# Altium PCB PCB1.PcbDoc
Units mil, origin at the board's own origin, x right, y up, seen from the top; angles counter-clockwise.
Board outline 6950 x 9300 mil, 2 copper layers (Top Layer, Bottom Layer); 17 components, 47 nets, 191 pads, 110 vias.
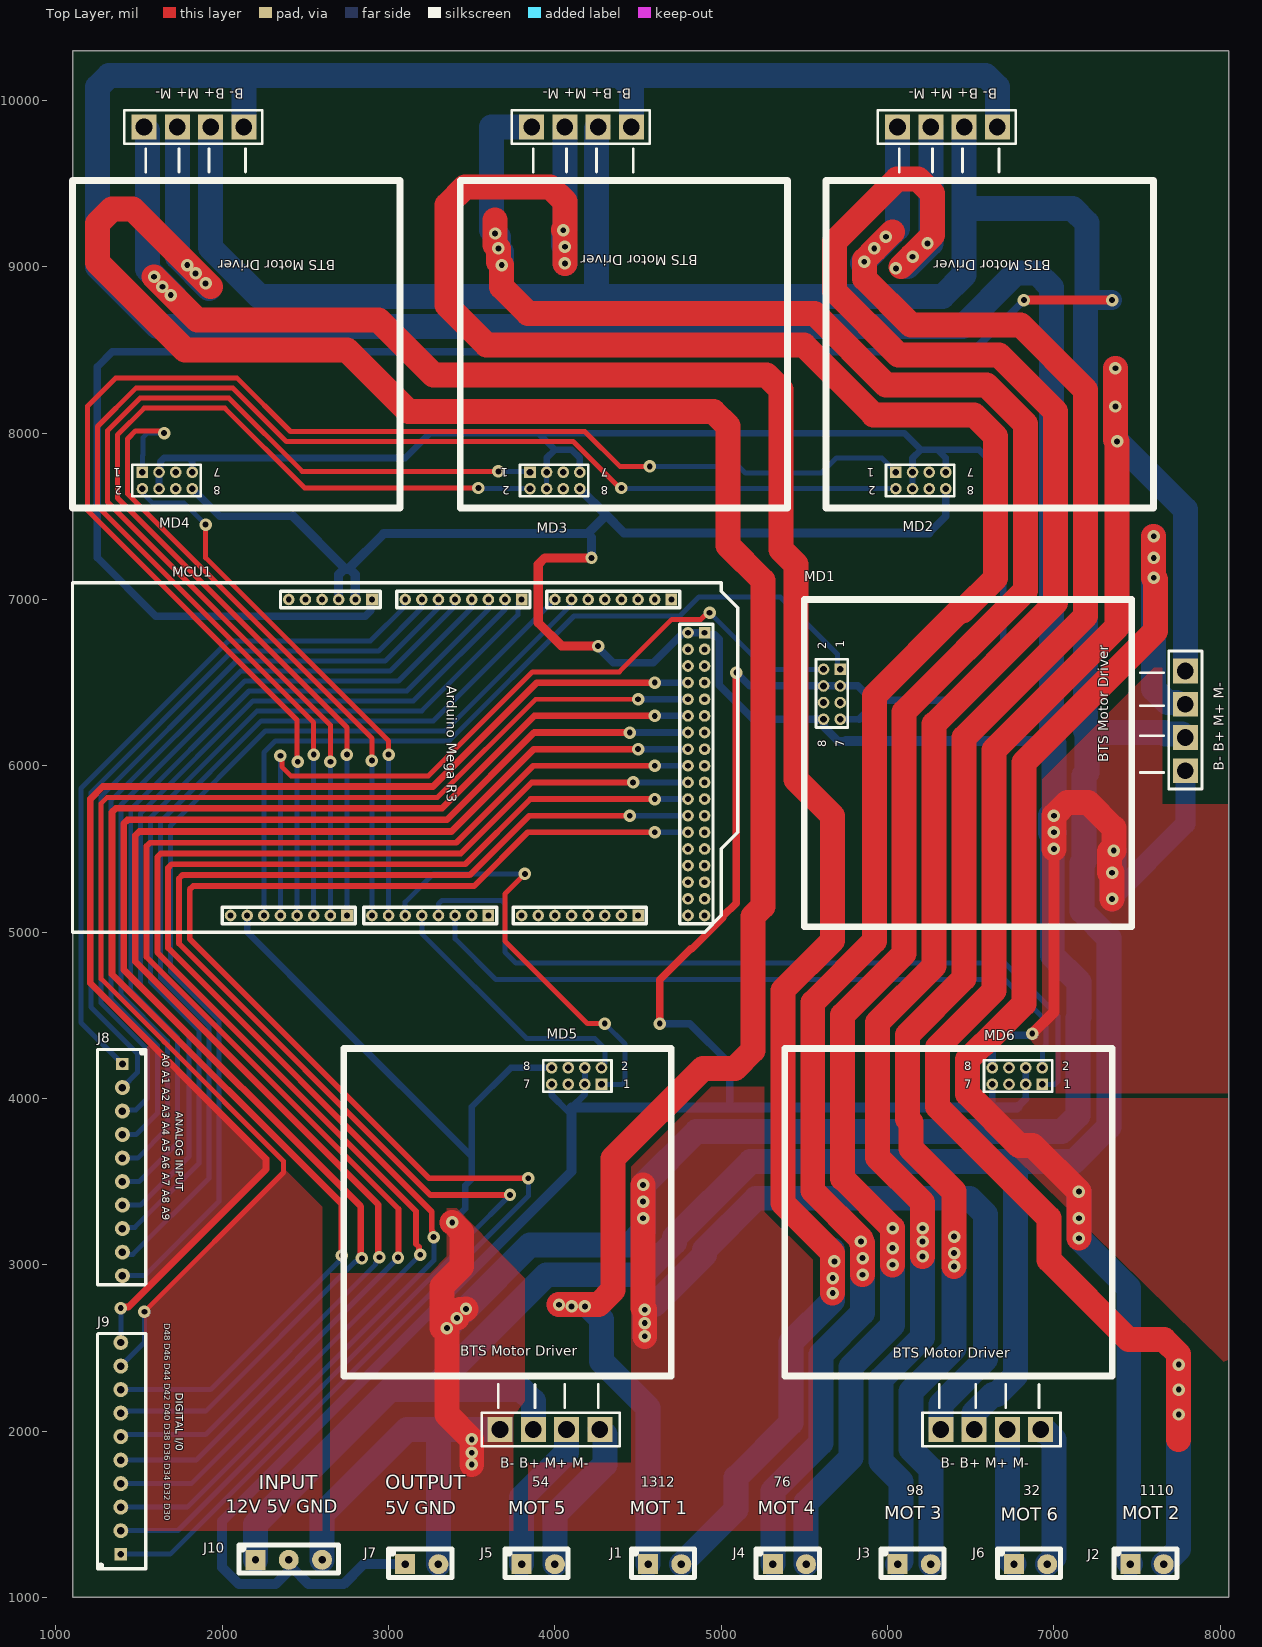
[diagram p0: Top Layer view]
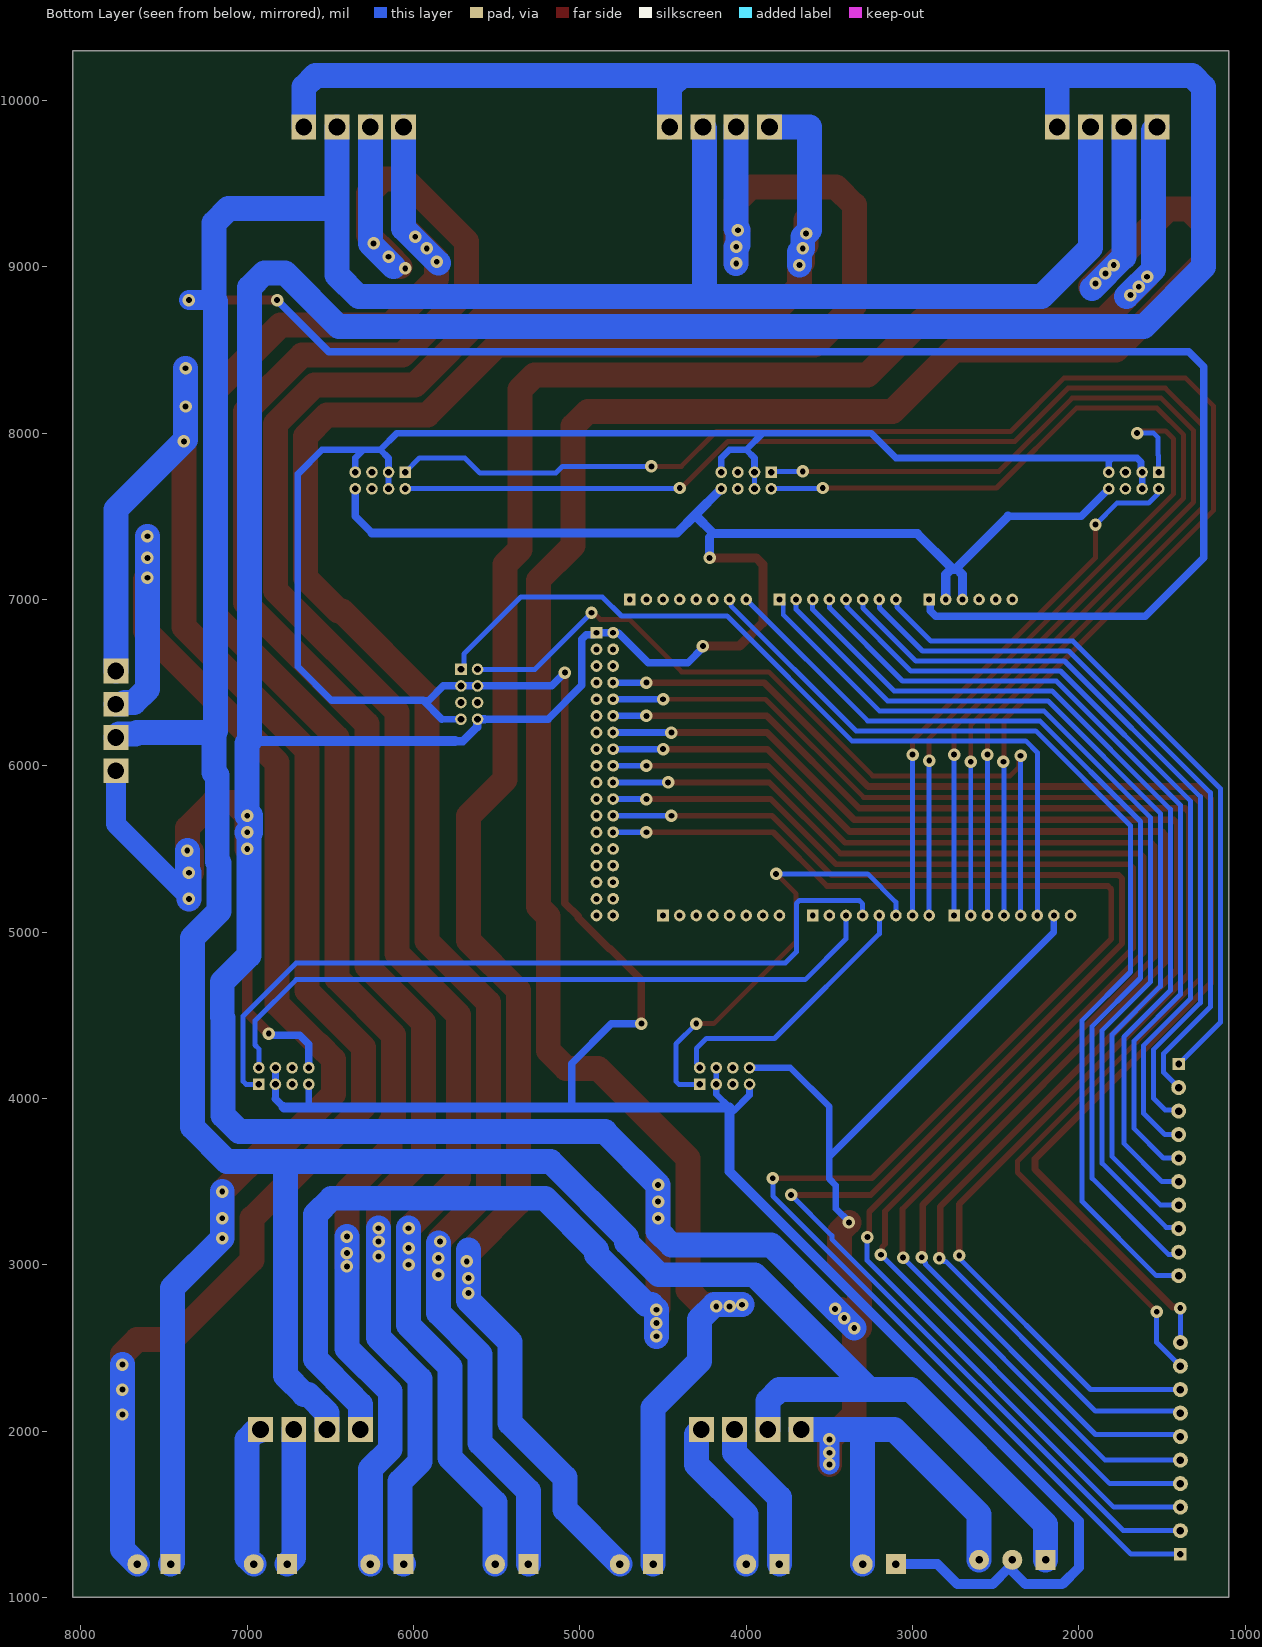
[diagram p1: Bottom Layer view, seen from below]
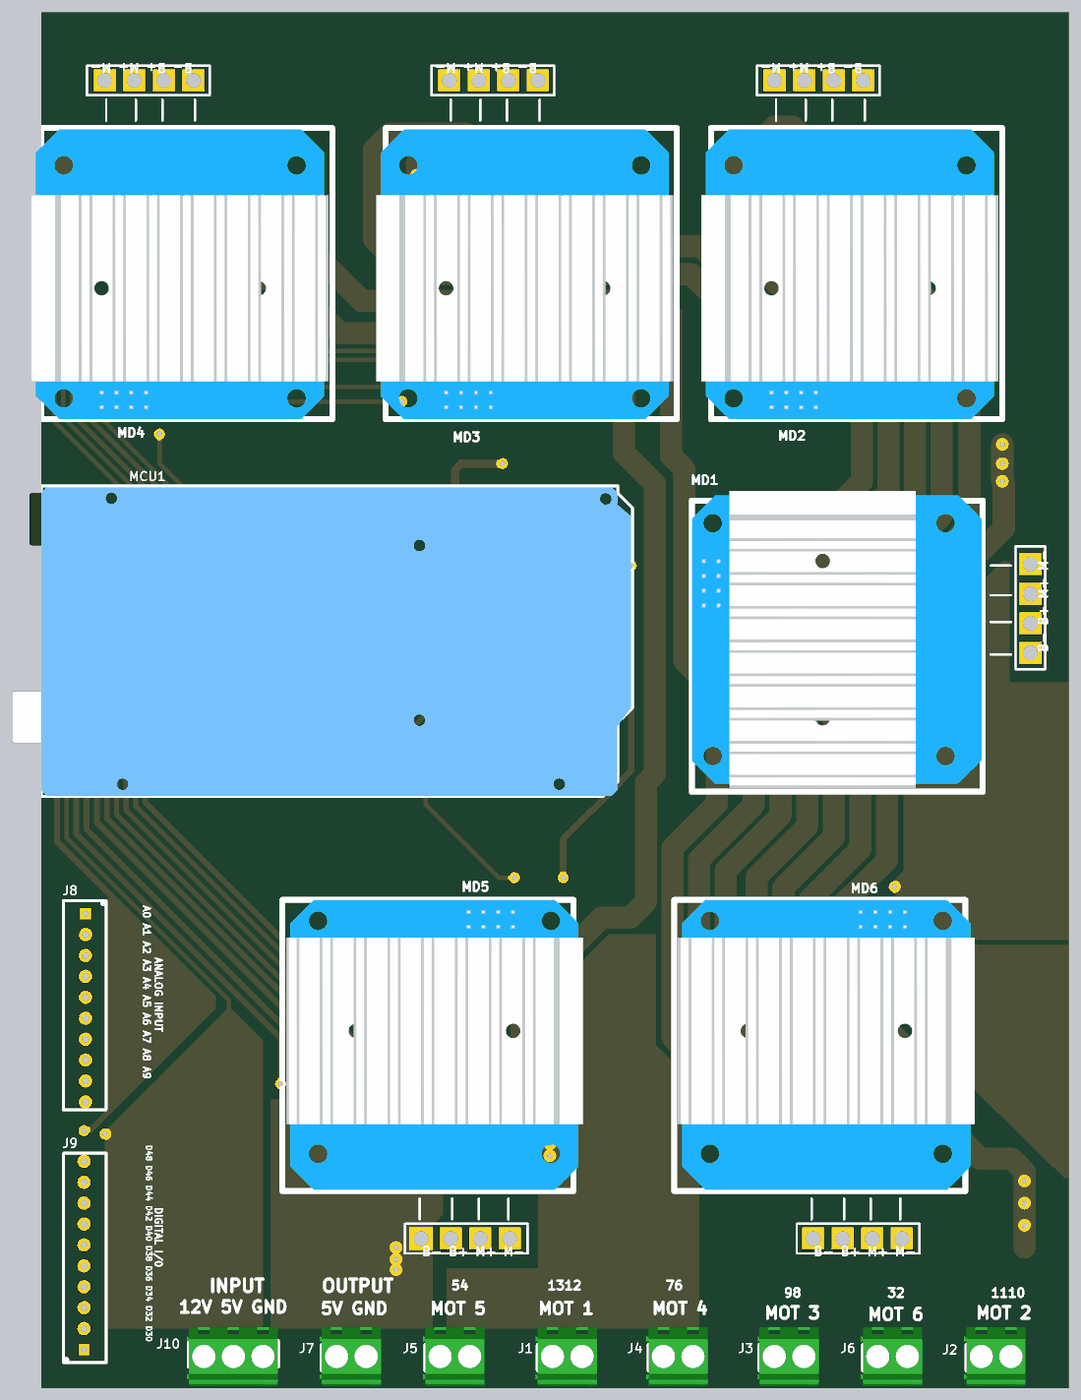
[diagram p2: 3D render of the assembled board from above, using the file's embedded part models]

## Layer stack, top to bottom
Top Solder: solder mask 0.4, Solder Resist, Dk 3.5
Top Layer: signal copper 1.4
Dielectric 1: dielectric 12.6, FR-4, Dk 4.8
Bottom Layer: signal copper 1.4
Bottom Solder: solder mask 0.4, Solder Resist, Dk 3.5

## Board outline
1100,1000 1100,10300 8050,10300 8050,1000

## Design rules (kind name [scope] priority, off if disabled: settings)
Clearance [All] p1: gap=30 ignorepadtopadclearanceinfootprint=FALSE
Height [All] p1: minheight=0 maxheight=2000 prefheight=500
HoleSize [All] p1: absolutevalues=TRUE maxlimit=100 minlimit=30 maxpercent=80.000 minpercent=20.000
PlaneConnect [All] p1: planeconnectstyle=Direct reliefexpansion=20 reliefentries=4 reliefconductorwidth=10 reliefairgap=10
PolygonConnect [All] p1: connectstyle=Direct reliefconductorwidth=10 reliefentries=4 polygonreliefangle="90 Angle" airgapwidth=10
RoutingVias [All] p1: holewidth=35 width=70 viastyle="Through Hole" minholewidth=35 minwidth=70 maxholewidth=35 maxwidth=75
SolderMaskExpansion [All] p1: expansion=5 istentingtop=FALSE
Width [All] p1: maxlimit=150 minlimit=30 preferedwidth=30 minimp=50.000000 maximp=50.000000 favimp=50.000000
27 further rules are at their usual default settings.

## Components (designator, comment, footprint, x,y, rotation, side; value= is the part's Value field where it differs from the comment)
J1 "T_Block_2P" T_BLOCK_2P 4700,1200 r0 top locked
J2 "T_Block_2P" T_BLOCK_2P 7600,1200 r0 top locked
J3 "T_Block_2P" T_BLOCK_2P 6200,1200 r0 top locked
J4 "T_Block_2P" T_BLOCK_2P 5450,1200 r0 top locked
J5 "T_Block_2P" T_BLOCK_2P 3940,1200 r0 top locked
J6 "T_Block_2P" T_BLOCK_2P 6900,1200 r0 top locked
J7 "T_Block_2P" T_BLOCK_2P 3240,1200 r0 top locked
J8 "TBlock10p_3.6mm" T_BLOCK_3.6MM 1410,3567.1 r270 top locked
J9 "TBlock10p_3.6mm" T_BLOCK_3.6MM 1380,1900.06 r90 top locked
J10 "T_Block_3P" T_BLOCK_3P 2400,1226.3 r0 top locked
MCU1 "Arduino_Mega_R3" PCB_FOOTPRINT_MEGA 3160,6070 r270 top locked
MD1 "Motor Driver" PCB_BTS 6400,5900 r90 top locked
MD2 "Motor Driver" PCB_BTS 6730,8450 r180 top locked
MD3 "Motor Driver" PCB_BTS 4530,8450 r180 top locked
MD4 "Motor Driver" PCB_BTS 2200,8450 r180 top locked
MD5 "Motor Driver" PCB_BTS 3600,3400 r0 top locked
MD6 "Motor Driver" PCB_BTS 6250,3400 r0 top locked

## Footprints (in the part's own frame and the unit in brackets; to place one, negate y for a bottom-side part, rotate by r counter-clockwise, add the part's x,y. Pads: shape width x height; smd on the part's side, far side on the other; paste and mask are expansions set on the pad)
PCB_BTS [mil]
  rect 70x70 hole 40: 1(680,685)
  round 70 hole 40: 2(680,785) 3(580,685) 4(580,785) 5(480,685) 6(480,785) 7(380,685) 8(380,785)
  rect 150x150 hole 100: 9(270,-1390) 10(70,-1390) 11(470,-1390) 12(670,-1390)
  silkscreen extent -869,-1490 1100,900, body extent -844,-1060 1164,900, height 1306
PCB_FOOTPRINT_MEGA [mil] "Arduino_Mega"
  rect 70x70 hole 35.43: 0(970,440) 8(970,-410) 21(970,1340) 59(-930,-260) 67(-930,640) 75(-930,1540) 79(-730,1740)
  round 70 hole 35.43: 1(970,340) 2(970,240) 3(970,140) 4(970,40) 5(970,-60) 6(970,-160) 7(970,-260) 9(970,-510) 10(970,-610) 11(970,-710) 12(970,-810) 13(970,-910) 14(970,640) 15(970,740) 16(970,840) 17(970,940) 18(970,1040) 19(970,1140) 20(970,1240) 22(870,1640) 23(870,1740) 24(770,1640) 25(770,1740) 26(670,1640) 27(670,1740) 28(570,1640) 29(570,1740) 30(470,1640) 31(470,1740) 32(370,1640) 33(370,1740) 34(270,1640) 35(270,1740) 36(170,1640) 37(170,1740) 38(70,1640) 39(70,1740) 40(-30,1640) 41(-30,1740) 42(-130,1640) 43(-130,1740) 44(-230,1640) 45(-230,1740) 46(-330,1640) 47(-330,1740) 48(-430,1640) 49(-430,1740) 50(-530,1640) 51(-530,1740) 52(-630,1640) 53(-630,1740) 54(-930,-760) 55(-930,-660) 56(-930,-560) 57(-930,-460) 58(-930,-360) 60(-930,-60) 61(-930,40) 62(-930,140) 63(-930,240) 64(-930,340) 65(-930,440) 66(-930,540) 68(-930,840) 69(-930,940) 70(-930,1040) 71(-930,1140) 72(-930,1240) 73(-930,1340) 74(-930,1440) 76(970,-1010) 77(970,-1110) 78(-730,1640) 80(970,1740) 81(970,1640)
  silkscreen extent -1030,-2060 1070,1940, body extent -1020,-2257 1067,1927, height 490
T_BLOCK_2P [mil]
  rect 120x120 hole 45: 1(-140,0)
  round 120 hole 45: 2(60,0)
  silkscreen extent -240,-80 140,90, body extent -258,-184 158,210, height 571
T_BLOCK_3.6MM [mil]
  rect 75x75 hole 40: 1(-640,-10)
  round 90 hole 45: 2(-498.58,-10) 3(-357.16,-10) 4(-215.74,-10) 5(-74.32,-10) 6(67.1,-10) 7(208.52,-10) 8(349.94,-10) 9(491.36,-10) 10(632.78,-10)
  silkscreen extent -727,-160 687,130
T_BLOCK_3P [mil]
  rect 120x120 hole 45: 1(-200,0)
  round 120 hole 45: 2(0,0) 3(200,0)
  silkscreen extent -300,-80 300,90, body extent -316,-210 300,184, height 571

## Part data
J1 J2 J3 J4 J5 J6 J7 J8 J9 J10: "Terminal"
MCU1: library part Mega, "Arduino Mega"
MD1 MD2 MD3 MD4 MD5 MD6: library part BTS

## Via types
v1: diameter 75, hole 35, Top Layer to Bottom Layer, 110 vias

## Nets (pads, with @x,y where several pads share a name; then routed paths per layer and width w, separated by ;. In a path a pad name is that pad's centre, name@x,y a point inside that pad or via, vN(x,y) a via of type N, cw(c..) or ccw(c..) an arc to the next point about the centre after c; other vN are vias at no path point)
5V: J7.1 J10.2 MD1.3 MD1.4 MD1.7 MD2.3 MD2.4 MD2.7 MD3.3 MD3.4 MD3.7 MD4.3 MD4.4 MD4.7 MD5.3 MD5.4 MD5.7 MD6.3 MD6.4 MD6.7 | length 21342
  Top Layer w45: v1(4630,4450) 4630,4714 4816.26,4900.25 4824,4900.25 5010.25,5086.51 5010.25,5094.25 5090,5174 v1(5090,6560)
  Bottom Layer w30: MD4.3 MD4.3@1626.51,7771.51 ; MD3.4 MD3.3 ; 4077.22,3922.78 4100,3945.55
  Bottom Layer w35: MD5.3 MD5.4 ; MD2.4 MD2.3
  Bottom Layer w40: MD4.4 MD4.3 ; MD4.3@1626.51,7771.51 1626.51,7826.51 1650,7850 1800,7850 ; MD4.7 1820,7830 1800,7850 ; MD3.3 3950,7850 4000,7900 ; MD5.7 3980,4020 4077.22,3922.78 ; 4100,3945.55 4180,4025.55 MD5.3 ; MD3.7 4150,7850 4100,7900 4000,7900 ; MD1.7 5830,6280 ; 5907.46,6392.54 5942.54,6392.54 ; MD2.3 6150,7850 6200,7900 ; MD2.7 6350,7850 6300,7900 ; 6492.54,6392.54 6695,6595 6695,7755 6550,7900 6300,7900 ; 6630,3970 MD6.7 ; 6830,3997.57 MD6.3 MD6.4 ; 1800,7850 3100,7850 3250,8000 3900,8000 ; 3900,8000 6100,8000 6200,7900 ; 3900,8000 4000,7900 ; 6200,7900 6300,7900
  Bottom Layer w45: v1(4630,4450) 4810,4450 5050,4210 5050,3945.55 ; v1(5090,6560) 5170,6480 MD1.3 ; MD1.3@5726.55,6480 5820,6480 5907.46,6392.54 ; 5830,6280 5942.54,6392.54 6492.54,6392.54 ; 6782.43,3950 6830,3997.57
  Bottom Layer w60: J10.2 2400,1160 2320,1080 2100,1080 2000,1180 2000,1460 4100,3560 4100,3922.78 4100,3945.55 5050,3945.55 6630,3945.55 6777.98,3945.55 6782.43,3950 ; J10.2@2420,1180 2520,1080 2730,1080 2850,1200 J7.1
12V: J10.1 MCU1.59 MD1.9 MD2.9 MD3.9 MD4.9 MD5.9 MD6.9 | length 32575.4
  Top Layer w55: v1(6820,8800) v1(7350,8800)
  Bottom Layer w45: MCU1.59 2892.27,6992.27 2892.27,6932.27 2860,6900 1600,6900 1250,7250 1250,8400 1340,8490 6510,8490 v1(6820,8800)
  Bottom Layer w120: 7200,8800 v1(7350,8800)
  Bottom Layer w150: MD4.9 1930,9114.56 2223.66,8820.9 4230,8820.9 ; J10.1 2200,1440 3010,2250 3260,2250 ; MD5.9 3870,2180 3800,2250 3260,2250 ; MD3.9 4250,9830 4250,8840.9 4230,8820.9 ; MD2.9 6460,9350 ; MD6.9 6520,2108.49 6632.89,2221.38 6657.11,2221.38 6770,2334.26 6770,3620 ; MD1.9 7770,6190 7671.51,6190 7661.51,6200 7200,6200 ; 3260,2250 3950,2940 4524.56,2940 4719.56,3135 4719.56,3164.12 5175.44,3620 6770,3620 ; 4230,8820.9 4230.9,8820 6329.1,8820 6460,8950.9 6460,9350 ; 6460,9350 7112.13,9350 7200,9262.13 7200,8800 7190,8790 7190,6210 7200,6200 ; 6770,3620 7120.71,3620 7330,3829.29 7330,4965.44 7170,5125.44 7170,5415.44 7180,5425.44 7180,5940.44 7200,5960.44 7200,6200
A0: J8.1 MCU1.60 | length 4204.2
  Bottom Layer w30: J8.1 1150,4457.1 1150,5863.68 2036.32,6750 2890,6750 3093.43,6953.43 3093.43,6993.43 MCU1.60
A1: J8.2 MCU1.61 | length 4426.7
  Bottom Layer w30: J8.2 1490,4155.68 1490,4270 1210,4550 1210,5838.82 2061.18,6690 2940,6690 3198.43,6948.43 3198.43,6998.43 MCU1.61
A2: J8.3 MCU1.62 | length 4661.9
  Bottom Layer w30: J8.3 1407.65,3931.91 1481.91,3931.91 1550,4000 1550,4294.85 1270,4574.85 1270,5813.97 2086.03,6630 2980,6630 3298.43,6948.43 3298.43,6998.43 MCU1.62
A3: J8.4 MCU1.63 | length 4852.8
  Bottom Layer w30: J8.4 1482.84,3782.84 1610,3910 1610,4319.71 1330,4599.71 1330,5789.12 2110.88,6570 3010,6570 3393.43,6953.43 3393.43,6993.43 MCU1.63
A4: J8.5 MCU1.64 | length 5055.4
  Bottom Layer w30: J8.5 1491.42,3641.42 1670,3820 1670,4344.56 1390,4624.56 1390,5764.26 2135.74,6510 3060,6510 3498.43,6948.43 3498.43,6998.43 MCU1.64
A5: J8.6 MCU1.65 | length 5258
  Bottom Layer w30: J8.6 1500,3500 1730,3730 1730,4369.41 1450,4649.41 1450,5739.41 2160.59,6450 3110,6450 3600,6940 MCU1.65
A6: J8.7 MCU1.66 | length 5463
  Bottom Layer w30: J8.7 1508.58,3358.58 1800,3650 1800,4384.26 1510,4674.26 1510,5714.56 2185.44,6390 3150,6390 3700,6940 MCU1.66
A7: J8.8 MCU1.67 | length 5636.3
  Bottom Layer w30: J8.8 1407.65,3224.81 1474.81,3224.81 1860,3610 1860,4409.12 1570,4699.12 1570,5689.71 2210.29,6330 3200,6330 3777.23,6907.23 3777.23,6977.23 MCU1.67
A8: J8.9 MCU1.68 | length 5903.1
  Bottom Layer w30: J8.9 1407.65,3068.09 1431.91,3068.09 1437.57,3062.43 1462.43,3062.43 1920,3520 1920,4433.97 1630,4723.97 1630,5630 1630,5664.85 2235.15,6270 3270,6270 MCU1.68
A9: J8.10 MCU1.69 | length 6135.6
  Bottom Layer w30: J8.10 1534.32,2934.32 1980,3380 1980,4470 1690,4760 1690,5640 2260,6210 3340,6210 4092.35,6962.35 4092.35,6992.35 MCU1.69
D30: J9.1 MCU1.30 | length 9515.4
  Top Layer w35: v1(3840,3520) 3243.15,3520 1804.87,4958.29 1804.87,5257 1825.37,5277.5 3514.42,5277.5 3836.92,5600 v1(4600,5600)
  Bottom Layer w30: J9.1 1686.73,1260.06 3840,3413.33 v1(3840,3520)
  Bottom Layer w35: v1(4600,5600) MCU1.30
D32: J9.2 MCU1.32 | length 9412.2
  Top Layer w35: v1(3730,3420) 3251.23,3420 1739.87,4931.36 1739.87,5322 1760.37,5342.5 3487.49,5342.5 3844.99,5700 v1(4450,5700)
  Bottom Layer w30: J9.2 1390.78,1402.26 1733.78,1402.26 3485.21,3153.68 3485.21,3175.21 v1(3730,3420)
  Bottom Layer w35: v1(4450,5700) MCU1.32
D34: J9.3 MCU1.34 | length 8815.9
  Top Layer w35: v1(3270.83,3166.7) 3263.18,3174.35 3263.18,3201.3 3260,3204.48 3260,3319.31 1674.87,4904.44 1674.87,5387 1695.37,5407.5 3460.57,5407.5 3853.07,5800 v1(4600,5800)
  Bottom Layer w30: J9.3 1789.57,1542.9 3272.5,3025.83 3272.5,3165.03 v1(3270.83,3166.7)
  Bottom Layer w35: v1(4600,5800) MCU1.34
D36: J9.4 MCU1.36 | length 8792
  Top Layer w35: v1(3190,3060) 3182.35,3067.65 3182.35,3107.65 3165.12,3124.88 3165.12,3322.26 1609.87,4877.51 1609.87,5452 1630.37,5472.5 3433.64,5472.5 3861.14,5900 v1(4470,5900)
  Bottom Layer w30: J9.4 1814.32,1684.32 v1(3190,3060)
  Bottom Layer w35: v1(4470,5900) MCU1.36
D38: J9.5 MCU1.38 | length 8730.4
  Top Layer w35: v1(3056.66,3043.34) 3060,3046.67 3060,3335.46 1544.87,4850.59 1544.87,5517 1565.37,5537.5 3406.72,5537.5 3869.22,6000 v1(4600,6000)
  Bottom Layer w30: J9.5 1841.81,1825.74 3056.66,3040.6 v1(3056.66,3043.34)
  Bottom Layer w35: v1(4600,6000) MCU1.38
D40: J9.6 MCU1.40 | length 8694.8
  Top Layer w40: v1(2944.7,3045.3) 2938,3052 2938,3362 1477.37,4822.63 1477.37,5581.57 1500.8,5605 3378.76,5605 3873.76,6100 v1(4500,6100)
  Bottom Layer w30: J9.6 1401.48,1978.64 1436.21,1978.64 1437.57,1980 1900,1980 2922.4,3002.4 2922.4,3010.83 2944.7,3033.13 v1(2944.7,3045.3)
  Bottom Layer w40: v1(4500,6100) MCU1.40
D42: J9.7 MCU1.42 | length 8661.2
  Top Layer w40: v1(2839.9,3038.74) 2833.2,3045.44 2833.2,3349.64 1407.37,4775.47 1407.37,5651.57 1430.8,5675 3349.77,5675 3874.77,6200 v1(4450,6200)
  Bottom Layer w30: J9.7 1401.42,2120 1900,2120 2800.99,3020.99 2809.97,3020.99 2827.72,3038.74 v1(2839.9,3038.74)
  Bottom Layer w40: v1(4450,6200) MCU1.42
D44: J9.8 MCU1.44 | length 8613.1
  Top Layer w40: v1(2719.23,3055.9) 2719.23,3364.62 1337.37,4746.48 1337.37,5721.57 1360.8,5745 3320.77,5745 3875.77,6300 v1(4600,6300)
  Bottom Layer w30: J9.8 1930,2250 2710.61,3030.61 2710.61,3047.29 v1(2719.23,3055.9)
  Bottom Layer w40: v1(4600,6300) MCU1.44
D46: J9.9 MCU1.46 | length 8028.8
  Top Layer w30: v1(1531.87,2718.13) 2368.54,3554.79 2368.54,3623.39 1651.18,4340.74 1272.37,4719.55 1272.37,5773.79 1308.58,5810 3293.85,5810 3883.85,6400 v1(4500,6400)
  Bottom Layer w30: J9.9 1531.87,2533.29 v1(1531.87,2718.13)
  Bottom Layer w40: v1(4500,6400) MCU1.46
D48: J9.10 MCU1.48 | length 7972.8
  Top Layer w40: v1(1390,2740) 1396.7,2746.7 1436.7,2746.7 2263.43,3573.43 2263.43,3636.57 1207.37,4692.63 1207.37,5800.72 1281.65,5875 3266.92,5875 3891.92,6500 v1(4600,6500)
  Bottom Layer w30: J9.10 v1(1390,2740)
  Bottom Layer w40: v1(4600,6500) MCU1.48
GND: J7.2 J10.3 MCU1.57 MCU1.58 MCU1.76 MCU1.78 MCU1.79 MD1.8 MD1.10 MD2.8 MD2.10 MD3.8 MD3.10 MD4.8 MD4.10 MD5.8 MD5.10 MD6.8 MD6.10 | length 49770.3
  Top Layer w55: v1(4220,7250) 3940,7250 3900,7210 3900,6860 4040,6720 v1(4260,6720)
  Top Layer w65: v1(6870,4390) 7000,4520 v1(7000,5500)
  Top Layer w150: v1@3320,2619.54 3320,2711.36 ; v1(3350.46,2619.54) 3350.46,2099.54 v1(3500,1950) v1(3500,1870) v1(3500,1800) ; v1(3382.5,3255.22) 3440,3197.72 3440,2990 3320,2870 3320,2711.36 ; v1(3410.46,2679.54) v1@3410.46,2711.36 ; v1(3465.46,2734.54) 3461.83,2730.91 3430.01,2730.91 v1@3410.46,2711.36 ; v1(4530,3480) v1(4530,3380) v1(4530,3280) 4530,2740 v1(4540,2730) v1(4540,2650) v1(4540,2570) ; v1(7000,5500) v1(7000,5600) v1(7000,5700) 7080.37,5780.37 7204.63,5780.37 7360,5625 v1(7360,5490) ; v1@7334.65,5357.3 v1@7334.65,5485.35 ; v1(7350,5200) v1(7350,5357.3) ; 3320,2711.36 v1@3410.46,2711.36
  Bottom Layer w30: 4195.78,7395.78 4220,7371.55
  Bottom Layer w35: 2731.76,7181.76 2737.57,7187.57
  Bottom Layer w40: MCU1.76 2150,5000 2654.02,4495.98 3500,3650 ; v1(3382.5,3255.22) 3382.5,3259.78 3461.36,3338.64 3461.36,3477.71 3500,3516.35 3500,3650 ; MD5.8 3735,4185 3500,3950 3500,3650 ; MD1.8@5606.88,6280 MD1.8 ; 5748,6148 5750,6150
  Bottom Layer w45: MD4.8 1985,7500 2425.15,7500 ; v1@4260,6710 4350,6620 4590,6620 4767.31,6797.31 4797.31,6797.31 MCU1.78 MCU1.79 4912.5,6787.5 4961.14,6787.5 4987.5,6761.14 4987.5,6483.93 5191.43,6280 5572.51,6280 ; 6250,7400 6350,7500 MD2.8 ; MD6.8 6630,4325.94 6684.06,4380 6838.79,4380 6843.05,4384.26 6864.26,4384.26 v1(6870,4390)
  Bottom Layer w50: 5572.51,6280 MD1.8 ; MD1.8@5617.55,6277.45 5617.55,6232.45 5702,6148 5748,6148
  Bottom Layer w55: 2425.15,7500 2737.57,7187.57 ; MCU1.57 2700,7150 2731.76,7181.76 2762.43,7181.76 ; MCU1.58 2800,7150 2762.43,7187.57 2970.63,7395.78 4195.78,7395.78 4307.5,7507.5 ; MD3.8 4307.5,7507.5 ; v1(4220,7250) 4220,7371.55 ; 6250,7400 4415,7400 4307.5,7507.5
  Bottom Layer w60: 5750,6150 6985,6150
  Bottom Layer w120: v1(3500,1800) v1(3500,1870) v1(3500,1950) 3500,2010 ; v1@7350,5210 7790,5650 MD1.10
  Bottom Layer w150: MD4.10 2130,10150 ; J10.3 2600,1500 3110,2010 3300,2010 ; J7.2 3300,2010 ; v1(3350.46,2619.54) v1(3410.46,2679.54) v1(3465.46,2734.54) 3850.92,3120 4450,3120 4530,3200 v1(4530,3280) v1(4530,3380) v1(4530,3480) 4850,3800 7046.15,3800 7144.57,3898.42 7144.57,4484.57 7150,4490 7150,4700 6990,4860 6990,5590 v1(7000,5600) ; MD5.10 3500,2010 3300,2010 ; MD3.10 4460,10079.71 4389.71,10150 ; v1(4540,2570) v1(4540,2650) v1(4540,2730) 4570,2760 4599.12,2760 4899.56,3060.44 4899.56,3089.56 5210,3400 6492.13,3400 6590,3302.13 6590,2433.05 6360,2203.05 6360,2200.88 6320,2160.88 MD6.10 ; MD2.10 6660,10079.71 6589.71,10150 4389.71,10150 ; v1@6980,5600 v1@6980,5700 ; v1(7000,5700) 7000,6135 6985,6150 6985,8875.92 6897.13,8963.79 6772.87,8963.79 6449.08,8640 1610,8640 1250,9000 1250,10079.71 1320.29,10150 2130,10150 ; v1(7350,5200) 7350,5210 v1(7350,5357.3) ; v1@7360,5357.3 v1(7360,5490) ; 2130,10150 4389.71,10150
NetJ1_1: J1.1 MD4.11 | length 14399.1
  Top Layer w150: v1@1930,8880 1462.13,9347.87 1337.87,9347.87 1250,9260 1250,9025.44 1775.44,8500 2750,8500 3120,8130 4952.13,8130 5040,8042.13 5040,7325 5250,7115 5250,5153.68 5190,5093.68 5190,4287.87 5082.13,4180 4890,4180 4350,3640 4350,2847.87 4262.13,2760 v1(4024.56,2760)
  Bottom Layer w150: MD4.11 1730,9060 v1@1920,8870 ; v1(4024.56,2760) 4192.13,2760 4280,2672.13 4280,2420 4560,2140 J1.1
  other v1: 4100,2750 4180,2750 1900,8900 1840,8960 1790,9010
NetJ1_2: J1.2 MD4.12 | length 13222.3
  Top Layer w150: v1(1590,8940) 1850,8680 2940,8680 3270,8350 5272.13,8350 5360,8262.13 5360,7300 5450,7210 5450,5917.37 5670,5697.37 5670,4950.34 5370,4650.34 5370,3370.88 5670,3070.88 v1(5670,2830)
  Bottom Layer w150: MD4.12 1550,9820 1550,8985.44 v1@1714.54,8820.9 ; J1.2 5090,1530 5090,1720 5420,2050 5420,2535.84 5670,2785.84 v1(5670,2830) 5670,3090
  other v1: 5670,2920 5680,3020 1690,8830 1640,8880
NetJ2_1: J2.1 MD1.11 | length 8535.1
  Top Layer w150: v1(7150,3160) v1(7150,3440) 6872.57,3717.43 6790.43,3717.43 6480,4027.87 6480,4232.99 6572.01,4325 6576.25,4325 6820,4568.75 6820,6020 7610,6810 7610,7120 v1(7600,7130) v1(7600,7380)
  Bottom Layer w150: v1(7150,3440) v1(7150,3160) 7450,2860 7450,1210 J2.1 ; v1(7600,7380) 7600,6461.51 7681.51,6380 7736.07,6380 7746.07,6370 MD1.11
  other v1: 7150,3280 7600,7250
NetJ2_2: J2.2 MD1.12 | length 10833.5
  Top Layer w150: v1@7370,7960 v1(7370,8160) v1(7370,8390) ; v1(7380,7950) 7380,6834.56 6640,6094.56 6640,4647.55 6300,4307.55 6300,3950 6970,3280 6970,3030 7450,2550 7662.13,2550 7750,2462.13 v1(7750,2400) v1(7750,2250) v1(7750,2100) 7750,1950
  Bottom Layer w150: v1(7370,8390) 7370,7960 7790,7540 MD1.12 ; J2.2 7750,1290 v1(7750,2100) v1(7750,2250) v1(7750,2400)
NetJ3_1: J3.1 MD2.11 | length 11939
  Top Layer w150: v1@6080,9000 6145,9065 6270,9190 6270,9440 6182.13,9527.87 6057.87,9527.87 5682.13,9152.13 5682.13,8853.31 6065.44,8470 6669.12,8470 7010,8129.12 7010,6980 6280,6250 6280,4796.66 5940,4456.66 5940,3645.44 6210,3375.44 v1(6210,3220) v1(6210,3140) v1(6210,3050)
  Bottom Layer w150: J3.1 6080,1220 6080,1696.95 5960,1816.95 5960,2312.17 6210,2562.17 v1(6210,3220) ; 6120,9000 6260,9140 MD2.11
  other v1: 6050,8990 6150,9060 6240,9140
NetJ3_2: J3.2 MD2.12 | length 10818.4
  Top Layer w150: 6030,9210 5925,9105 5862.13,9042.13 5862.13,8927.87 6140,8650 6800,8650 7190,8260 7190,6899.12 6460,6169.12 6460,4722.11 6120,4382.11 6120,3875.44 6140,3855.44 6140,3700 6400,3440 v1(6400,3170) v1(6400,3070) v1(6400,2990)
  Bottom Layer w150: v1@5850,9021.34 6060,9231.34 MD2.12 ; J3.2 6260,1771.51 6140,1891.51 6140,2237.61 6400,2497.61 v1(6400,3170)
  other v1: 5860,9030 5920,9110 5990,9180
NetJ4_1: J4.1 MD3.11 | length 14013.7
  Top Layer w150: v1(4060,9020) 4060,9210 v1(4050,9220) 4060,9230 4060,9392.13 3972.13,9480 3460,9480 3350,9370 3350,8770 3590,8530 5496.32,8530 5916.32,8110 6520,8110 6650,7980 6650,7129.12 6450.88,6930 6430,6930 5920,6420 5920,4945.78 5550,4575.78 5550,3445.44 5840,3155.44 v1(5840,3140) 5850,3130 v1(5850,3040) v1(5850,2940)
  Bottom Layer w150: v1(4060,9020) v1(4060,9120) 4050,9130 v1(4050,9220) 4060,9230 MD3.11 ; J4.1 5310,1640 5600,1930 5600,2461.28 5850,2711.28 v1(5850,2940) v1(5850,3040) v1@5850,3130
NetJ4_2: J4.2 MD3.12 | length 12874.4
  Top Layer w150: 3640,9280 3640,9130 v1(3660,9110) 3660,9030 v1(3680,9010) 3680,8877.87 3837.87,8720 5560.88,8720 5990.88,8290 6594.56,8290 6830,8054.56 6830,7054.56 6100,6324.56 6100,4871.22 5730,4501.22 5730,3520 v1(6030,3220) v1(6030,3100) v1(6030,3000)
  Bottom Layer w150: v1(3680,9010) 3680,9090 v1(3660,9110) 3660,9180 3620,9220 3620,9840 MD3.12 ; J4.2 5510,1570 5780,1840 5780,2386.73 6030,2636.73 v1(6030,3220)
  other v1: 3640,9200
NetJ5_1: J5.1 MD5.11 | length 921.8
  Bottom Layer w150: J5.1 3800,1600 4070,1870 MD5.11
NetJ5_2: J5.2 MD5.12 | length 946.7
  Bottom Layer w150: J5.2 4000,1500 4300,1800 4300,1980 MD5.12
NetJ6_1: J6.1 MD6.11 | length 826.6
  Bottom Layer w150: MD6.11 6720,1240 J6.1
NetJ6_2: J6.2 MD6.12 | length 871.4
  Bottom Layer w150: MD6.12 6930,2000 6950,2000 7000,1950 7000,1240 J6.2
NetMCU1_2: MCU1.2 MD6.2 | length 4188.3
  Bottom Layer w30: MCU1.2 3400,4960 3645.4,4714.6 6705.4,4714.6 6952.5,4467.5 6952.5,4321.25 6930,4298.75 MD6.2
NetMCU1_3: MCU1.3 MD6.1 | length 4756.1
  Bottom Layer w30: MCU1.3 3300,5170 3320,5190 3642.43,5190 3681,5190 3698.58,5172.43 3698.58,4880.88 3764.73,4814.73 6705.27,4814.73 7024.57,4495.43 7024.57,4102.57 7007,4085 MD6.1
NetMCU1_4: MCU1.4 MD5.2 | length 1619.1
  Bottom Layer w30: MCU1.4 3200,4990 3830,4360 4240,4360 4300,4300 4300,4214.2 4280,4194.2 MD5.2
NetMCU1_5: MCU1.5 MD5.1 | length 2677.7
  Top Layer w30: v1(3820,5350) 3700,5230 3700,4945.94 4195.94,4450 v1(4300,4450)
  Bottom Layer w30: MCU1.5 3100,5180 3270,5350 v1(3820,5350) ; MD5.1 4405,4085 4422.57,4102.57 4422.57,4327.43 v1(4300,4450)
NetMCU1_6: MCU1.6 MD4.2 | length 3289.3
  Top Layer w30: v1(1900,7450) 1900,7250 3000,6150 v1(3000,6067.5)
  Bottom Layer w30: MD4.2 1527.65,7657.35 1527.65,7632.35 1581.63,7578.37 1771.63,7578.37 v1(1900,7450) ; MCU1.6 v1(3000,6067.5)
NetMCU1_7: MCU1.7 MD4.1 | length 4067.4
  Top Layer w30: v1(1650,8000) 1641.88,8000 1627.88,8014 1479.08,8014 1430,7964.92 1430,7635.15 2900,6165.15 v1(2900,6031.44)
  Bottom Layer w30: MD4.1 1520,7863.93 1525,7868.93 1525,7975 1550,8000 v1(1650,8000) ; MCU1.7 v1(2900,6031.44)
NetMCU1_8: MCU1.8 MD3.2 | length 6208.6
  Top Layer w30: v1(2750,6067.5) 2750,6230.29 1370,7610.29 1370,7989.77 1530.23,8150 2015.44,8150 2495.44,7670 v1(3540,7670)
  Bottom Layer w30: MCU1.8 v1(2750,6067.5) ; v1(3540,7670) 3542.5,7667.5 3847.5,7667.5 MD3.2
NetMCU1_9: MCU1.9 MD3.1 | length 6274.9
  Top Layer w30: v1(2650,6023.94) 2650,6245.44 1310,7585.44 1310,8014.62 1505.38,8210 2040.29,8210 2480.29,7770 v1(3660,7770)
  Bottom Layer w30: MCU1.9 v1(2650,6023.94) ; v1(3660,7770) 3845,7770 MD3.1
NetMCU1_10: MCU1.10 MD2.2 | length 8624
  Top Layer w30: v1(2550,6067.5) 2550,6260.59 1250,7560.59 1250,8039.48 1480.52,8270 2065.15,8270 2385.15,7950 4110,7950 4390,7670 v1(4400,7670)
  Bottom Layer w30: MCU1.10 v1(2550,6067.5) ; v1(4400,7670) 4402.5,7667.5 6047.5,7667.5 MD2.2
NetMCU1_11: MCU1.11 MD2.1 | length 8824.9
  Top Layer w30: v1(2453.46,6023.94) 2450,6027.4 2450,6275.74 1190,7535.74 1190,8161.84 1358.16,8330 2090,8330 2410,8010 4180,8010 4390,7800 v1(4570,7800)
  Bottom Layer w30: MCU1.11 2450,6020.48 v1(2453.46,6023.94) ; v1(4570,7800) 5104.84,7800 5144.84,7760 5601.56,7760 5691.56,7850 5965,7850 MD2.1
NetMCU1_12: MCU1.12 MD1.2 | length 4855
  Top Layer w30: v1(2350,6060) 2358.61,6051.39 2358.61,5994.17 2412.78,5940 3240,5940 3865,6565 4387.69,6565 4702.69,6880 4877.82,6880 4917.82,6920 v1(4930,6920)
  Bottom Layer w30: MCU1.12 v1(2350,6060) ; v1(4930,6920) 5270,6580 MD1.2
NetMCU1_13: MCU1.13 MD1.1 | length 5056.4
  Bottom Layer w30: MCU1.13 2250,6080 2320,6150 3364.85,6150 4114.85,6900 4750,6900 4865,7015 5355,7015 5698,6672 5698,6597 MD1.1
pads on no net: MCU1.0 MCU1.1 MCU1.14 MCU1.15 MCU1.16 MCU1.17 MCU1.18 MCU1.19 MCU1.20 MCU1.21 MCU1.22 MCU1.23 MCU1.24 MCU1.25 MCU1.26 MCU1.27 MCU1.28 MCU1.29 MCU1.31 MCU1.33 MCU1.35 MCU1.37 MCU1.39 MCU1.41 MCU1.43 MCU1.45 MCU1.47 MCU1.49 MCU1.50 MCU1.51 MCU1.52 MCU1.53 MCU1.54 MCU1.55 MCU1.56 MCU1.70 MCU1.71 MCU1.72 MCU1.73 MCU1.74 MCU1.75 MCU1.77 MCU1.80 MCU1.81 MD1.5 MD1.6 MD2.5 MD2.6 MD3.5 MD3.6 MD4.5 MD4.6 MD5.5 MD5.6 MD6.5 MD6.6

## Polygon pours and split planes (outlines as drawn)
D46 on Top Layer "D46_L01_P001" (solid, pour order 1): 1530,2730 2375,3575 2600,3350 2600,1400 1530,1400
GND on Top Layer "GND_L01_P008" (solid, pour order 8): 8050,4500 8050,4000 7010,4000 7010,4500
NetJ2_1 on Top Layer "NETJ2_1_L01_P006" (solid, pour order 6): 6410,4000 8050,4000 8050,2389.82
GND on Top Layer "GND_L01_P005" (solid, pour order 5): 8050,4300 6910,4300 6830,4380 6930,4480 6930,5920 7600,6590 7650,6590 7650,5770 8050,5770
GND on Top Layer "GND_L01_P004" (solid, pour order 4): 4460,3590 4940,4070 5260,4070 5260,3320 5550,3030 5550,1400 5540,1400 5520,1400 3840,1400 3840,1810 4460,1810
GND on Top Layer "GND_L01_P002" (solid, pour order 2): 2650,2950 2750,2950 3250,2950 3350,3050 3350,3340 3410,3340 3820,2920 3820,2180 3750,2092.5 3750,1400 3550,1400 2650,1400
D48 on Top Layer "D48_L01_P000" (solid, pour order 0): 1550,2850 2263.43,3563.43 2263.43,3636.57 1550,4350

## Silkscreen, mask and mechanical layers (free items; w line width, h text height)
Top Overlay:
  text "A0 A1 A2 A3 A4 A5 A6 A7 A8 A9" at 1640,4270 h47 r270
  text "ANALOG INPUT" at 1720,3920 h47 r270
  text "D48 D46 D44 D42 D40 D38 D36 D34 D32 D30" at 1650,2650 h37 r270
  text "DIGITAL I/0" at 1720,2230 h47 r270
  text "54" at 3865,1665 h60
  text "1312" at 4515,1665 h60
  text "76" at 5315,1665 h60
  text "INPUT" at 2220,1650 h85
  text "OUTPUT" at 2980,1650 h85
  text "98" at 6115,1615 h60
  text "32" at 6815,1615 h60
  text "1110" at 7515,1615 h60
  text "12V 5V GND" at 2020,1510 h80
  text "5V GND" at 2980,1500 h80
  text "MOT 5" at 3720,1500 h80
  text "MOT 1" at 4450,1500 h80
  text "MOT 4" at 5220,1500 h80
  text "MOT 3" at 5980,1470 h80
  text "MOT 2" at 7410,1470 h80
  text "MOT 6" at 6680,1460 h80
Mechanical 1:
  the board outline again, w10

## Text inside footprints (layer, text, board x,y; h text height)
MCU1: Top Overlay "Arduino Mega R3" at 3350,6480 h60 r270
MD1: Top Overlay "B- B+ M+ M-" at 8020,5970 h60 r90; Top Overlay "1" at 5740,6710 h50 r90; Top Overlay "2" at 5630,6700 h50 r90; Top Overlay "8" at 5630,6110 h50 r90; Top Overlay "7" at 5740,6110 h50 r90; Top Overlay "BTS Motor Driver" at 7348.89,6020 h100 r90
MD2: Top Overlay "BTS Motor Driver" at 6980,9058.89 h100 r180; Top Overlay "7" at 6520,7790 h50 r180; Top Overlay "8" at 6520,7680 h50 r180; Top Overlay "2" at 5930,7680 h50 r180; Top Overlay "1" at 5920,7790 h50 r180; Top Overlay "B- B+ M+ M-" at 6660,10070 h60 r180
MD3: Top Overlay "B- B+ M+ M-" at 4460,10070 h60 r180; Top Overlay "1" at 3720,7790 h50 r180; Top Overlay "2" at 3730,7680 h50 r180; Top Overlay "8" at 4320,7680 h50 r180; Top Overlay "7" at 4320,7790 h50 r180; Top Overlay "BTS Motor Driver" at 4860,9088.89 h100 r180
MD4: Top Overlay "BTS Motor Driver" at 2680,9058.89 h100 r180; Top Overlay "7" at 1990,7790 h50 r180; Top Overlay "8" at 1990,7680 h50 r180; Top Overlay "2" at 1400,7680 h50 r180; Top Overlay "1" at 1390,7790 h50 r180; Top Overlay "B- B+ M+ M-" at 2130,10070 h60 r180
MD5: Top Overlay "B- B+ M+ M-" at 3670,1780 h60; Top Overlay "1" at 4410,4060 h50; Top Overlay "2" at 4400,4170 h50; Top Overlay "8" at 3810,4170 h50; Top Overlay "7" at 3810,4060 h50; Top Overlay "BTS Motor Driver" at 3430,2431.11 h100
MD6: Top Overlay "BTS Motor Driver" at 6030,2421.11 h100; Top Overlay "7" at 6460,4060 h50; Top Overlay "8" at 6460,4170 h50; Top Overlay "2" at 7050,4170 h50; Top Overlay "1" at 7060,4060 h50; Top Overlay "B- B+ M+ M-" at 6320,1780 h60